# Altium PCB PCB_Приёмник-диплом_2026-05-31.pcbdoc
Units mm, origin at the board's own origin, x right, y up, seen from the top; angles counter-clockwise.
Board outline 133.48 x 96.9 mm, 2 copper layers (Top Layer, Bottom Layer); 20 components, 15 nets, 95 pads, 0 vias.
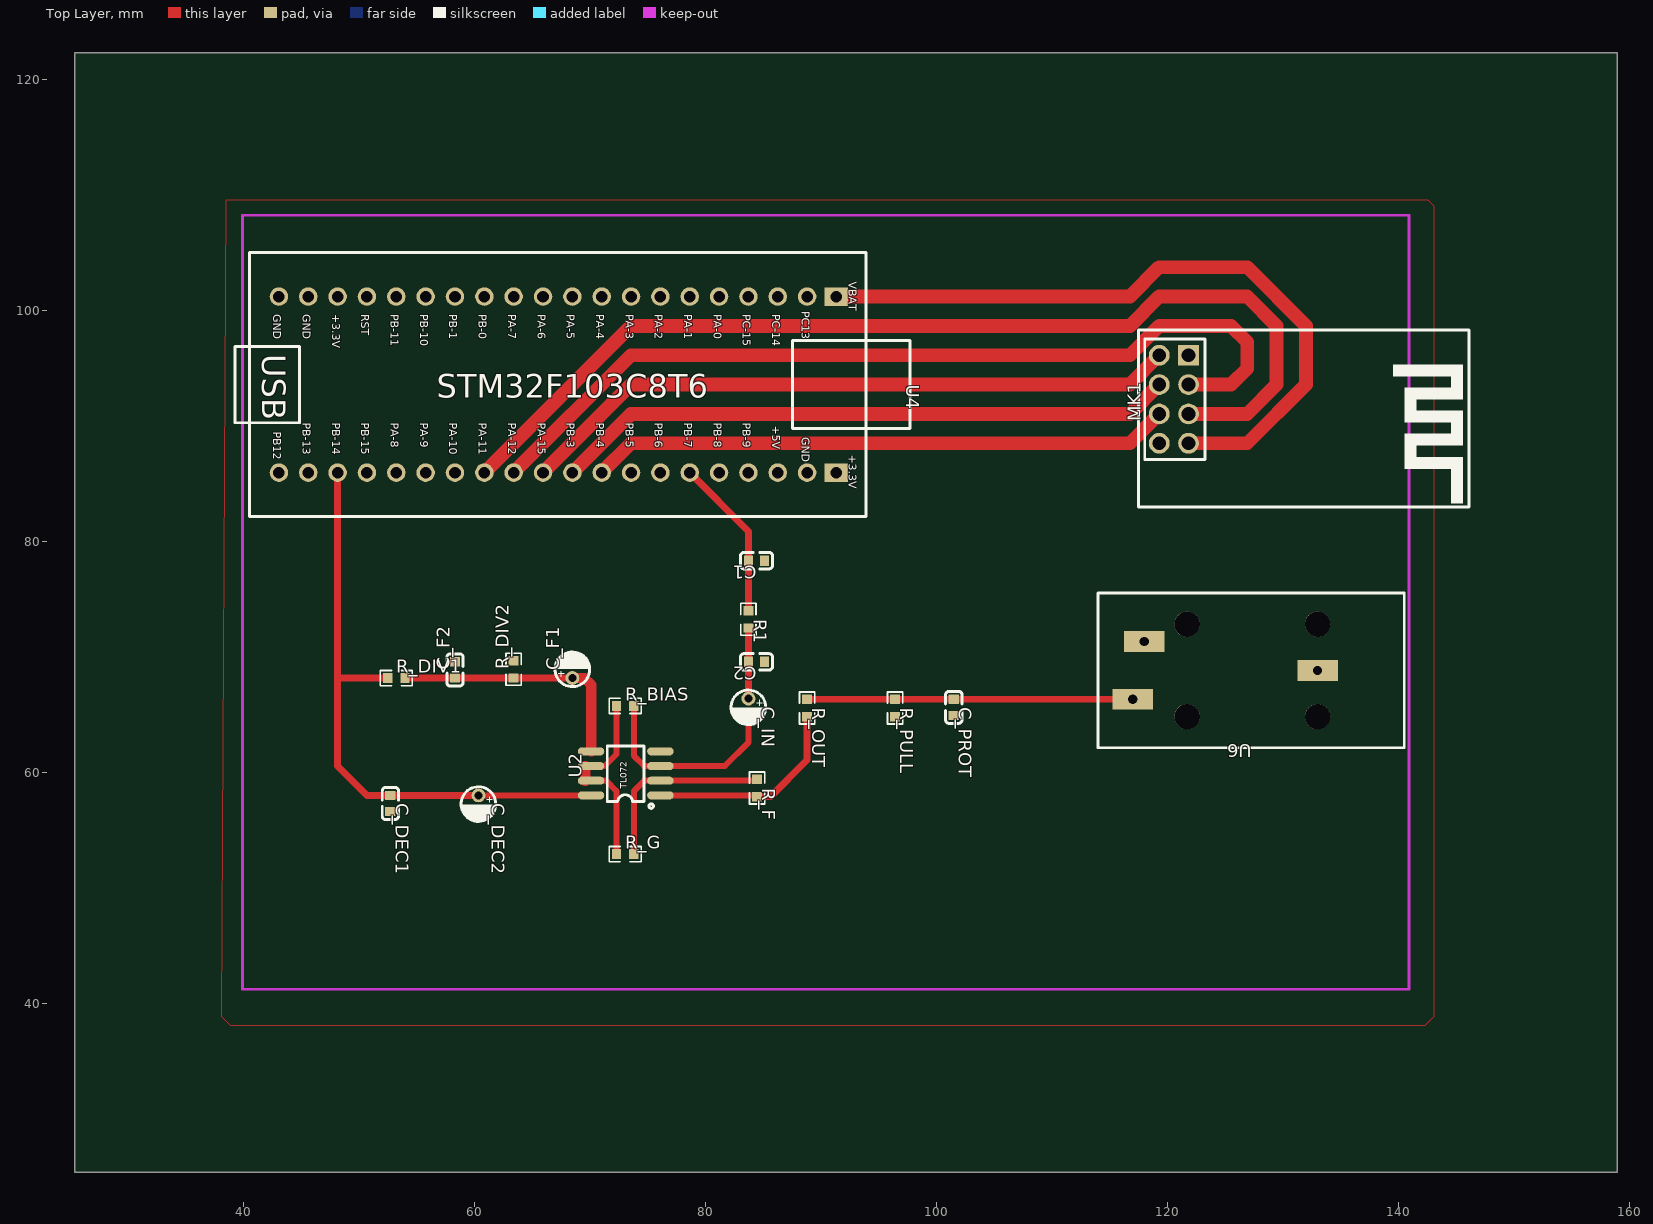
[diagram p0: Top Layer view]
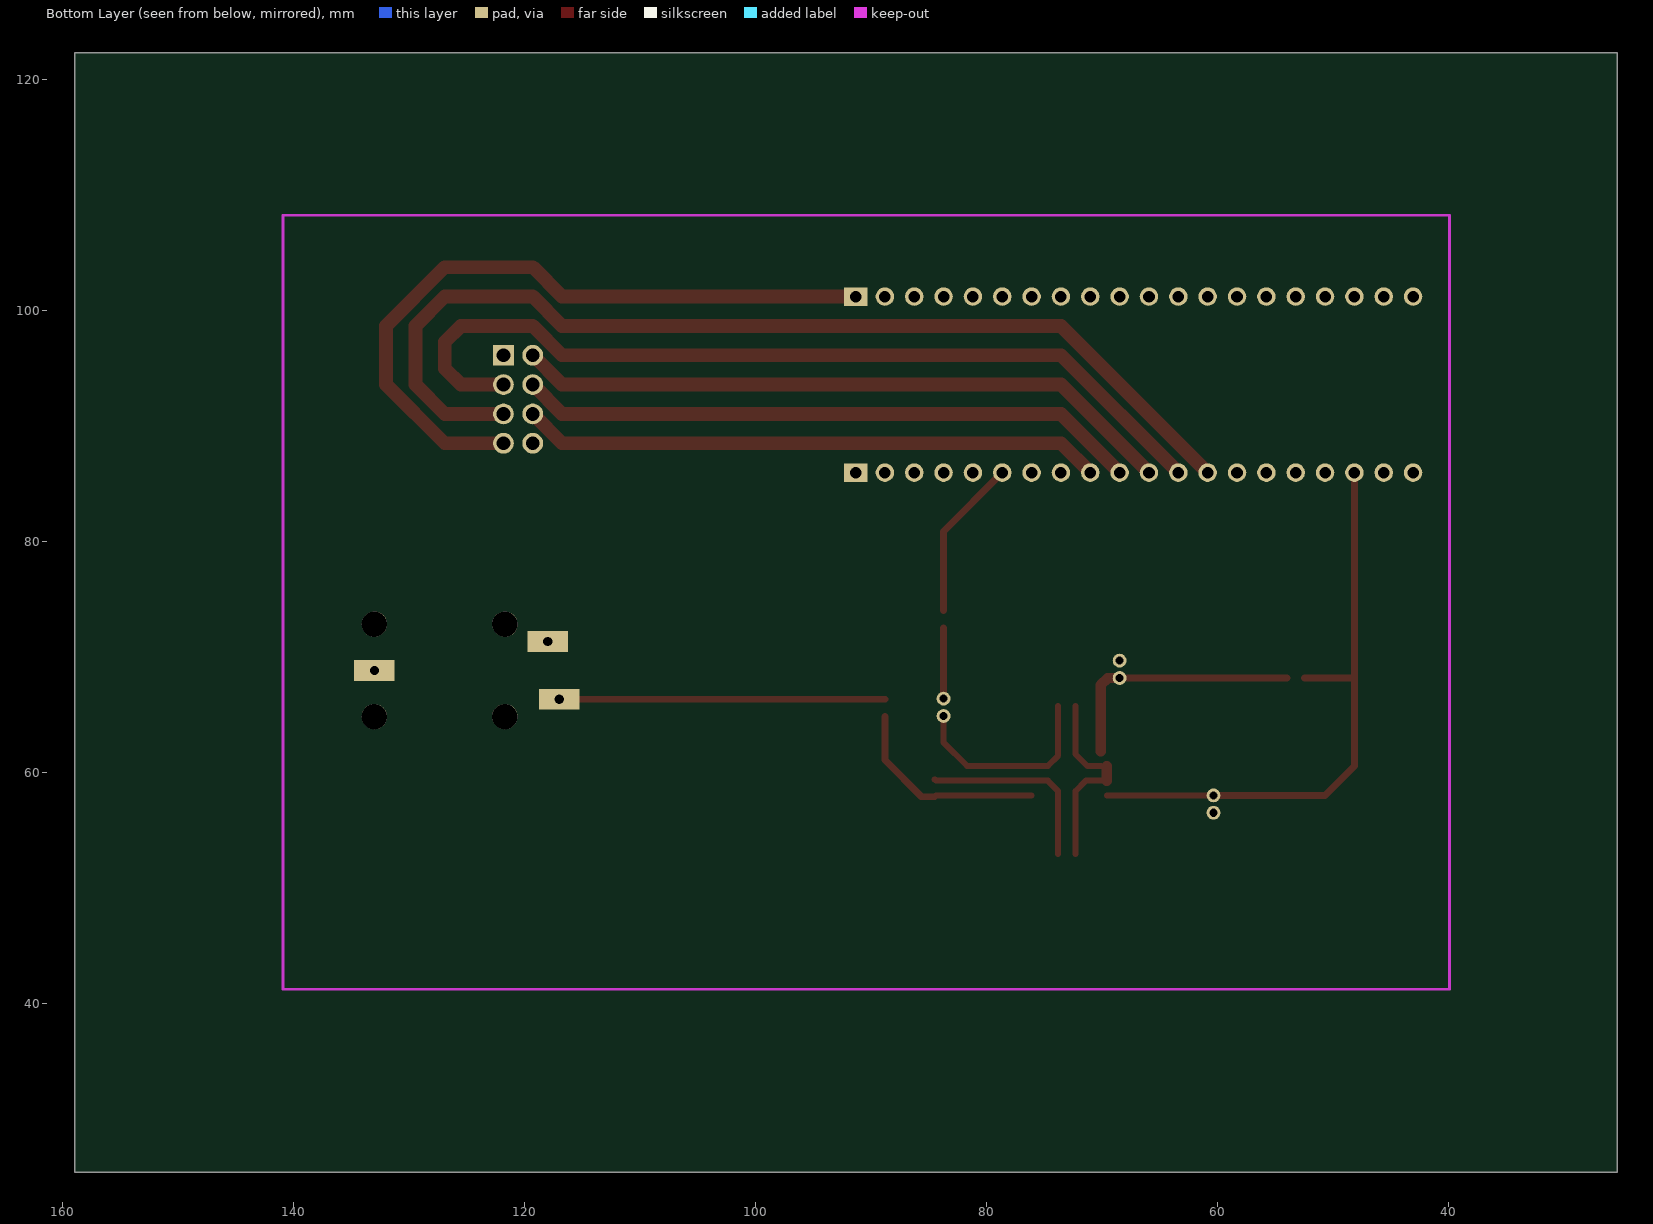
[diagram p1: Bottom Layer view, seen from below]

## Layer stack, top to bottom
Top Layer: signal copper (thickness not stored)
Dielectric: dielectric 0.32, FR-4, Dk 4.8
Bottom Layer: signal copper (thickness not stored)

## Board outline
158.88,25.4 25.4,25.4 25.4,122.301 158.88,122.301

## Components (designator, comment, footprint, x,y, rotation, side; value= is the part's Value field where it differs from the comment)
C1 "10n" C0603 84.393,78.359 r180 top
C2 "10n" C0603 84.393,69.596 r180 top
C_DEC1 "0.1u" C0603 52.705,57.339 r270 top
C_DEC2 "10u" CAP-D3.0×F1.5 60.325,57.288 r270 top
C_F1 "10u" CAP-D3.0×F1.5 68.453,68.95 r90 top
C_F2 "0.1u" C0603 58.293,68.899 r90 top
C_IN "1u" CAP-D3.0×F1.5 83.693,65.659 r270 top
C_PROT "100pf" C0603 101.473,65.659 r270 top
MK1 "2.4GHz" WIRELM-SMD_L28.6-W15.3-P2.54_NRF24L01 120.523,92.329 r90 top
R1 "2k" R0603 83.693,73.279 r270 top
R_BIAS "100k" R0603 73.025,65.786 r0 top
R_DIV1 "10k" R0603 53.213,68.199 r0 top
R_DIV2 "10k" R0603 63.373,68.952 r90 top
R_F "10k" R0603 84.455,58.674 r270 top
R_G "10k" R0603 73.025,52.959 r0 top
R_OUT "100" R0603 88.773,65.606 r270 top
R_PULL "10k" R0603 96.393,65.606 r270 top
U2 "TL072" TL072 73.533,60.579 r90 top
U4 "Blue_Pill" "STM32F103C8T6-BLUEPILL 1" 68.453,93.599 r270 top
U6 "ST-008S-05" ST-008S-05 140.462,62.159 r180 top

## Footprints (in the part's own frame and the unit in brackets; to place one, negate y for a bottom-side part, rotate by r counter-clockwise, add the part's x,y. Pads: shape width x height; smd on the part's side, far side on the other; paste and mask are expansions set on the pad)
C0603 [mm]
  rect 0.8x0.9 smd paste+0 mask+0.051: 1(-0.7,0) 2(0.7,0)
  silkscreen extent -1.39,-0.71 1.39,0.71
CAP-D3.0×F1.5 [mm]
  round 1.2 hole 0.7 paste+0 mask+0.102: 1(-0.751,0) 2(0.751,0)
  silkscreen extent -1.5,-1.5 1.5,1.5
R0603 [mm]
  rect 0.806x0.864 smd paste-100 mask+0.051: 1(-0.753,0) 2(0.753,0)
  silkscreen extent -1.39,-0.66 1.39,0.66
ST-008S-05 [mm]
  rect 3.5x1.8 hole 0.8 paste+0 mask+0.051: 2(7.5,-6.7) 3(22.5,-9.2) 4(23.5,-4.2)
  round 2.2 hole 2.2 unplated paste+0: ""(7.5,-2.7) ""(7.5,-10.7) ""(18.8,-10.7) ""(18.8,-2.7)
  silkscreen extent 0,-13.4 26.5,0
"STM32F103C8T6-BLUEPILL 1" [mm]
  rect 1.6x2.032 hole 1 paste+0 mask+0.102: 1(-7.62,22.86) 40(7.62,22.86)
  round 1.6 hole 1 paste+0 mask+0.102: 2(-7.62,20.32) 3(-7.62,17.78) 4(-7.62,15.24) 5(-7.62,12.7) 6(-7.62,10.16) 7(-7.62,7.62) 8(-7.62,5.08) 9(-7.62,2.54) 10(-7.62,0) 11(-7.62,-2.54) 12(-7.62,-5.08) 13(-7.62,-7.62) 14(-7.62,-10.16) 15(-7.62,-12.7) 16(-7.62,-15.24) 17(-7.62,-17.78) 18(-7.62,-20.32) 19(-7.62,-22.86) 20(-7.62,-25.4) 21(7.62,-25.4) 22(7.62,-22.86) 23(7.62,-20.32) 24(7.62,-17.78) 25(7.62,-15.24) 26(7.62,-12.7) 27(7.62,-10.16) 28(7.62,-7.62) 29(7.62,-5.08) 30(7.62,-2.54) 31(7.62,0) 32(7.62,2.54) 33(7.62,5.08) 34(7.62,7.62) 35(7.62,10.16) 36(7.62,12.7) 37(7.62,15.24) 38(7.62,17.78) 39(7.62,20.32)
  silkscreen extent -11.43,-29.21 11.43,29.21
TL072 [mil]
  oval 27.56x90 smd paste+0 mask+4: 1(-100,-100) 2(-50,-100) 3(0,-100) 4(50,-100) 5(50,136.22) 6(0,136.22) 7(-50,136.22) 8(-100,136.22)
  silkscreen extent -144,-76 68,81
WIRELM-SMD_L28.6-W15.3-P2.54_NRF24L01 [mm]
  rect 1.8x1.8 hole 1.2 paste+0 mask+0.051: 1(3.807,-1.27)
  round 1.8 hole 1.2 paste+0 mask+0.051: 2(3.81,1.27) 3(1.27,-1.27) 4(1.27,1.27) 5(-1.27,-1.27) 6(-1.27,1.27) 7(-3.81,-1.27) 8(-3.81,1.27)
  silkscreen extent -9.31,-25.53 5.99,3.07

## Nets (pads, with @x,y where several pads share a name; then routed paths per layer and width w, separated by ;. In a path a pad name is that pad's centre, name@x,y a point inside that pad or via, vN(x,y) a via of type N, cw(c..) or ccw(c..) an arc to the next point about the centre after c; other vN are vias at no path point)
ADC_OUT: C1.2 R1.1 U4.35 | length 14.1
  Top Layer w0.6: U4.35 83.693,80.899 C1.2 R1.1
GND: C1.1 C2.1 C_DEC1.2 C_DEC2.2 C_F1.2 C_F2.2 C_PROT.2 MK1.8 R_DIV2.2 R_PULL.2 U2.4 U4.2 U4.21 U4.22 U6.2
IN_2: C_F1.1 C_F2.1 R_DIV1.2 R_DIV2.1 U2.5 | length 22.1
  Top Layer w0.6: R_DIV1.2 C_F2.1 R_DIV2.1 C_F1.1
  Top Layer w0.9: C_F1.1 69.469,68.199 70.073,67.595 U2.5
LFF_OUT: C2.2 C_IN.1 R1.2 | length 6.1
  Top Layer w0.6: C_IN.1 C2.2 R1.2
OUT: R_F.2 R_OUT.2 U2.1 | length 17.8
  Top Layer w0.525: U2.1 84.337,58.039 R_F.2
  Top Layer w0.6: R_F.2 85.606,57.92 88.773,61.087 R_OUT.2
U2_2: R_F.1 R_G.2 U2.2 | length 16.5
  Top Layer w0.525: R_G.2 73.778,58.411 74.676,59.309 U2.2 84.337,59.309 R_F.1
U2_3: C_IN.2 R_BIAS.2 U2.3 | length 17.7
  Top Layer w0.525: R_BIAS.2 73.778,61.477 74.676,60.579 U2.3 81.661,60.579 83.693,62.611 C_IN.2
U4_28: MK1.5 U4.28 | length 89.7
  Top Layer w1.2: U4.28 73.533,98.679 116.713,98.679 119.253,101.219 126.873,101.219 129.413,98.679 129.413,93.599 126.873,91.059 MK1.5
U4_29: MK1.3 U4.29 | length 77.3
  Top Layer w1.2: U4.29 73.533,96.139 116.713,96.139 119.253,98.679 125.476,98.679 126.873,97.282 126.873,94.996 125.476,93.599 MK1.3
U4_30: MK1.2 U4.30 | length 57.5
  Top Layer w1.2: U4.30 73.533,93.599 116.713,93.599 MK1.2
U4_31: MK1.4 U4.31 | length 54
  Top Layer w1.2: U4.31 73.533,91.059 116.713,91.059 MK1.4
U4_32: MK1.6 U4.32 | length 50.4
  Top Layer w1.2: U4.32 73.533,88.519 116.713,88.519 MK1.6
U6_4: C_PROT.1 R_OUT.1 R_PULL.1 U6.4 | length 28.2
  Top Layer w0.6: R_OUT.1 R_PULL.1 C_PROT.1 U6.4
V_REF: R_BIAS.1 R_G.1 U2.6 U2.7 | length 16.1
  Top Layer w0.525: U2.7 71.374,59.309 72.272,58.411 R_G.1 ; U2.6 71.247,60.579 72.272,61.604 R_BIAS.1
  Top Layer w0.9: U2.7@69.565,59.309 U2.6@69.565,60.579
VCC: C_DEC1.1 C_DEC2.1 MK1.7 R_DIV1.1 U2.8 U4.1 U4.23 | length 113.6
  Top Layer w0.525: C_DEC2.1@60.071,58.039 U2.8@69.565,58.039
  Top Layer w0.6: 48.133,68.199 R_DIV1.1 ; U4.23 48.133,60.579 50.673,58.039 C_DEC1.1 C_DEC2.1
  Top Layer w1.2: U4.1 116.713,101.219 119.253,103.759 126.873,103.759 131.953,98.679 131.953,93.599 126.873,88.519 MK1.7
pads on no net: MK1.1 U4.3 U4.4 U4.5 U4.6 U4.7 U4.8 U4.9 U4.10 U4.11 U4.12 U4.13 U4.14 U4.15 U4.16 U4.17 U4.18 U4.19 U4.20 U4.24 U4.25 U4.26 U4.27 U4.33 U4.34 U4.36 U4.37 U4.38 U4.39 U4.40 U6. U6.3

## Polygon pours and split planes (outlines as drawn)
GND on Top Layer (solid): 38.481,109.601 142.494,109.601 143.002,109.093 143.002,38.862 142.24,38.1 38.862,38.1 38.1,38.862

## Text inside footprints (layer, text, board x,y; h text height)
U4: Top Overlay "VBAT" at 92.36,102.489 h0.7 r270; Top Overlay "PC13" at 88.296,99.949 h0.7 r270; Top Overlay "PC-14" at 85.756,99.695 h0.7 r270; Top Overlay "PC-15" at 83.216,99.695 h0.7 r270; Top Overlay "PA-0" at 80.676,99.695 h0.7 r270; Top Overlay "PA-1" at 78.136,99.695 h0.7 r270; Top Overlay "PA-2" at 75.596,99.695 h0.7 r270; Top Overlay "PA-3" at 73.056,99.695 h0.7 r270; Top Overlay "PA-4" at 70.516,99.695 h0.7 r270; Top Overlay "PA-5" at 67.976,99.695 h0.7 r270; Top Overlay "PA-6" at 65.436,99.695 h0.7 r270; Top Overlay "PA-7" at 62.896,99.695 h0.7 r270; Top Overlay "PB-0" at 60.356,99.695 h0.7 r270; Top Overlay "PB-1" at 57.816,99.695 h0.7 r270; Top Overlay "PB-10" at 55.276,99.695 h0.7 r270; Top Overlay "PB-11" at 52.736,99.695 h0.7 r270; Top Overlay "RST" at 50.196,99.695 h0.7 r270; Top Overlay "+3.3V" at 47.656,99.695 h0.7 r270; Top Overlay "GND" at 45.116,99.695 h0.7 r270; Top Overlay "GND" at 42.576,99.695 h0.7 r270; Top Overlay "+3.3V" at 92.36,87.503 h0.7 r270; Top Overlay "GND" at 88.296,89.027 h0.7 r270; Top Overlay "+5V" at 85.756,90.043 h0.7 r270; Top Overlay "PB-9" at 83.216,90.297 h0.7 r270; Top Overlay "PB-8" at 80.676,90.297 h0.7 r270; Top Overlay "PB-7" at 78.136,90.297 h0.7 r270; Top Overlay "PB-6" at 75.596,90.297 h0.7 r270; Top Overlay "PB-5" at 73.056,90.297 h0.7 r270; Top Overlay "PB-4" at 70.516,90.297 h0.7 r270; Top Overlay "PB-3" at 67.976,90.297 h0.7 r270; Top Overlay "PA-15" at 65.436,90.297 h0.7 r270; Top Overlay "PA-12" at 62.896,90.297 h0.7 r270; Top Overlay "PA-11" at 60.356,90.297 h0.7 r270; Top Overlay "PA-10" at 57.816,90.297 h0.7 r270; Top Overlay "PA-9" at 55.276,90.297 h0.7 r270; Top Overlay "PA-8" at 52.736,90.297 h0.7 r270; Top Overlay "PB-15" at 50.196,90.297 h0.7 r270; Top Overlay "PB-14" at 47.656,90.297 h0.7 r270; Top Overlay "PB-13" at 45.116,90.297 h0.7 r270; Top Overlay "PB12" at 42.576,89.535 h0.7 r270; Top Overlay "STM32F103C8T6" at 56.693,92.456 h2.03; Top Overlay "USB" at 41.59,96.215 h2.03 r270